# EAGLE board 184550_boards (EAGLE 5.10)
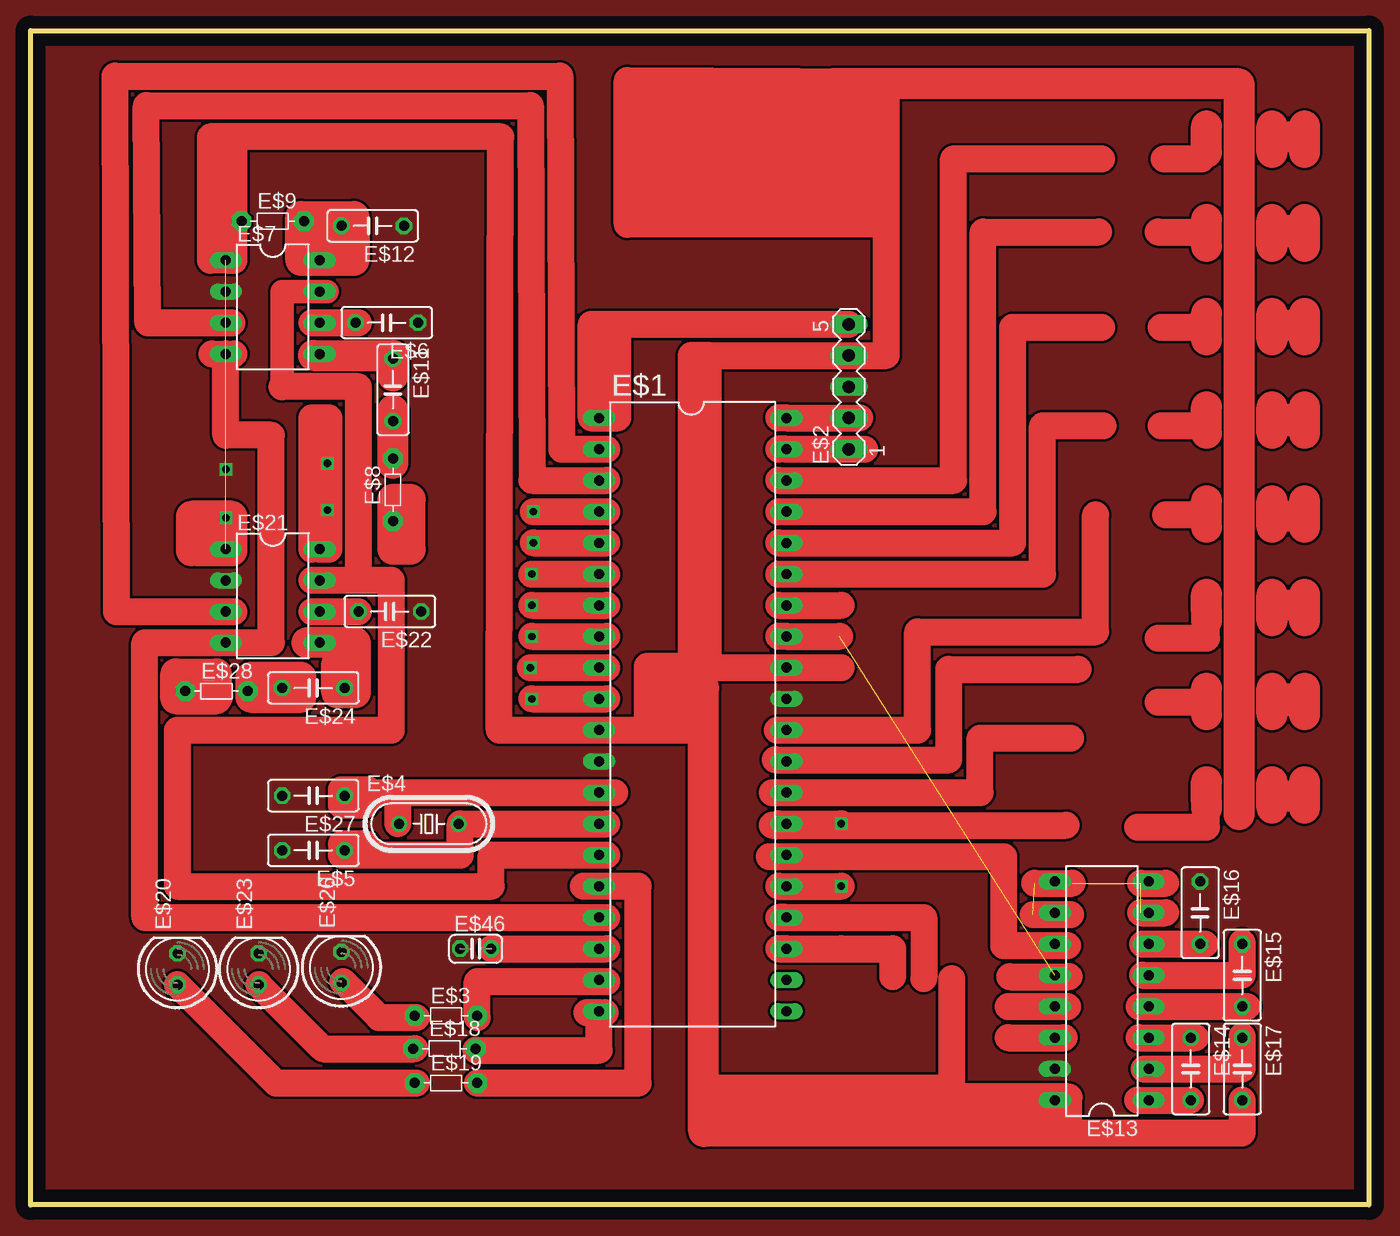
[diagram p0: board, top side]

Size 108.84 x 95.5 mm. Coordinates in mm from the lower left corner, seen from the top.
Outline: 0,95.5 108.84,95.5 108.84,0 0,0 0,95.5
Copper layers (1*16): Top 0.035mm / dielectric 1.5mm / Bottom 0.035mm
Design rules "default": minimum track width 10mil, minimum drill 24mil, track to track 8mil, track to pad 8mil, pad to pad 8mil, via to via 8mil, smd to smd 8mil, copper to edge 40mil, drill to drill 8mil, minimum pad ring 10mil, minimum via ring 8mil, stop-mask expansion 4mil, vias tented up to drill 0mil, thermal gap 10mil

## Footprints (pad centres in the part's own frame; a part is rotated, then mirrored left to right if it is on the bottom)
DIL40 = drill 0.813 long: 1 -24.13,-7.62; 2 -21.59,-7.62; 3 -19.05,-7.62; 4 -16.51,-7.62; 5 -13.97,-7.62; 6 -11.43,-7.62; 7 -8.89,-7.62; 8 -6.35,-7.62; 9 -3.81,-7.62; 10 -1.27,-7.62; 11 1.27,-7.62; 12 3.81,-7.62; 13 6.35,-7.62; 14 8.89,-7.62; 15 11.43,-7.62; 16 13.97,-7.62; 17 16.51,-7.62; 18 19.05,-7.62; 19 21.59,-7.62; 20 24.13,-7.62; 21 24.13,7.62; 22 21.59,7.62; 23 19.05,7.62; 24 16.51,7.62; 25 13.97,7.62; 26 11.43,7.62; 27 8.89,7.62; 28 6.35,7.62; 29 3.81,7.62; 30 1.27,7.62; 31 -1.27,7.62; 32 -3.81,7.62; 33 -6.35,7.62; 34 -8.89,7.62; 35 -11.43,7.62; 36 -13.97,7.62; 37 -16.51,7.62; 38 -19.05,7.62; 39 -21.59,7.62; 40 -24.13,7.62
MA05-1 = drill 1.016 long: 1 -5.08,0; 2 -2.54,0; 3 0,0; 4 2.54,0; 5 5.08,0
R-5 = drill 0.813 pad 1.6 octagon: 1 -2.54,0; 2 2.54,0
HC49/S = drill 0.813 round: 1 -2.413,0; 2 2.413,0
C050-025X075 = drill 0.813 octagon: 1 -2.54,0; 2 2.54,0
DIL08 = drill 0.813 long: 1 -3.81,-3.81; 2 -1.27,-3.81; 3 1.27,-3.81; 4 3.81,-3.81; 5 3.81,3.81; 6 1.27,3.81; 7 -1.27,3.81; 8 -3.81,3.81
DIL16 = drill 0.813 long: 1 -8.89,-3.81; 2 -6.35,-3.81; 3 -3.81,-3.81; 4 -1.27,-3.81; 5 1.27,-3.81; 6 3.81,-3.81; 7 6.35,-3.81; 8 8.89,-3.81; 9 8.89,3.81; 10 6.35,3.81; 11 3.81,3.81; 12 1.27,3.81; 13 -1.27,3.81; 14 -3.81,3.81; 15 -6.35,3.81; 16 -8.89,3.81
C050-030X075 = drill 0.813 octagon: 1 -2.54,0; 2 2.54,0
LED5MM = drill 0.813 octagon: A -1.27,0; K 1.27,0
C025-024X044 = drill 0.813 octagon: 1 -1.27,0; 2 1.27,0

## Placement (x,y rotation side)
E$1  [DIL40]  53.85,39.88 270 top
E$2  [MA05-1]  66.55,66.55 90 top
E$3  [R-5]  33.78,15.37 0 top
E$4  [HC49/S]  32.38,30.99 0 top
E$5  [C050-025X075]  22.99,28.83 180 top
E$6  [C050-025X075]  28.96,71.75 180 top
E$7  [DIL08]  19.69,73.02 270 top
E$8  [R-5]  29.46,58.17 90 top
E$9  [R-5]  19.69,80.01 0 top
E$11  [C050-025X075]  29.46,66.29 270 top
E$12  [C050-025X075]  27.81,79.63 180 top
E$13  [DIL16]  87.12,17.4 90 top
E$14  [C050-030X075]  94.36,11.05 270 top
E$15  [C050-030X075]  98.55,18.67 270 top
E$16  [C050-030X075]  95.12,23.75 270 top
E$17  [C050-030X075]  98.55,11.05 270 top
E$18  [R-5]  33.65,12.7 0 top
E$19  [R-5]  33.78,9.91 0 top
E$20  [LED5MM]  11.94,19.18 90 top
E$21  [DIL08]  19.69,49.53 270 top
E$22  [C050-025X075]  29.21,48.26 180 top
E$23  [LED5MM]  18.54,19.18 90 top
E$24  [C050-025X075]  22.99,42.04 180 top
E$26  [LED5MM]  25.27,19.3 90 top
E$27  [C050-025X075]  22.99,33.27 180 top
E$28  [R-5]  15.11,41.78 0 top
E$46  [C025-024X044]  36.2,20.83 0 top

## Library data of the parts
E$1 = 74xx-eu
E$2 = con-lstb
E$3 E$8 E$9 E$18 E$19 E$28 = discrete
E$4 = crystal
E$5 E$6 E$11 E$12 E$14-E$17 E$22 E$24 E$27 E$46 = rcl
E$7 E$13 E$21 = 40xx
E$20 E$23 E$26 = led

## Nets
GND: E$1.12 E$1.31 E$2.3 E$5.2 E$6.1 E$7.2 E$12.1 E$13.15 E$16.1 E$20.K E$21.2 E$22.1 E$23.K E$26.K E$27.2 E$46.1
S$3: E$1.39
S$4: E$1.40
S$17: E$7.3
S$35: E$1.23
S$36: E$1.24
S$52: E$7.8 E$9.2
S$57: E$1.33 E$13.12
S$59: E$14.2
S$73: E$2.5
S$74: E$21.8
S$77: E$23.A
S$78: E$20.A
S$83: E$7.4
S$124: E$7.1 E$21.1

## Tracks (layer width: path | path; a pad name or v marks a point on that pad's centre or on a via)
GND  (via drill 0.6)  (1 unrouted)
  other vias: 15.87,59.82
  pour Top (no thermals): -10.29,-13.72 136.4,-16.38 135.76,108.2 -2.54,101.6
S$1
  Top 2.54: 22.99,69.09 29.46,69.09 29.46,67.44
S$2
  Top 2.184: 22.86,71.75 26.67,71.75
S$3
  Top 2.184: 67.82,61.47 E$1.39 60.83,61.47
S$4
  Top 2.184: 67.44,64.01 E$1.40 60.83,64.01
S$5  (via drill 0.6)
  Top 2.184: 60.83,25.91 v65.91,25.91
S$6
  Top 2.184: 29.85,33.53 47.5,33.53 | 29.85,33.53 29.85,30.99 | 26.67,33.53 29.85,33.53
S$7
  Top 2.184: 16.13,76.83 14.6,76.83 14.6,86.87 16,86.87 | 55.12,43.69 55.12,69.09 | 55.12,43.69 65.91,43.69 | 50.04,38.61 55.12,43.69 | 50.04,38.61 38.1,38.61 38.23,86.87 16.51,86.87 | 50.04,38.61 54.36,38.61 54.36,38.86 | 55.12,69.09 53.72,69.09 53.72,43.18 | 55.12,69.09 69.6,69.09 69.6,79.76 | 69.6,79.76 48.51,79.76 48.51,91.44 69.6,91.31 69.6,79.76 | 16.51,86.87 16,86.87 | 16,86.87 16,79.5 | 16.51,86.87 16.51,76.83 16.13,76.83 | 16.13,76.83 16.13,84.45
S$8
  Top 2.54: 29.46,60.33 29.46,64.64
S$9  (via drill 0.6)
  Top 2.184: v40.89,56.39 46.86,56.39
S$10  (via drill 0.6)
  other vias: 24.13,56.52
S$11
  Top 2.184: 22.86,69.21 26.67,69.21
S$12
  Top 2.54: 29.46,53.34 29.46,57.4 30.86,57.4 30.86,53.34 29.46,53.34
S$13
  Top 2.54: 13.59,53.21 13.08,53.21 13.08,56.01 16.38,56.01 16.38,53.21 13.59,53.21 | 13.59,53.21 13.59,54.48
S$14  (via drill 0.6)
  other vias: 24.13,60.33
S$15
  Top 2.184: 46.86,30.99 34.92,30.99 34.92,28.45 25.27,28.45 25.27,29.34 27.3,29.34 27.3,28.57
S$16  (via drill 0.6)
  Top 2.184: v40.64,43.69 46.86,43.69
S$17
  Top 2.184: 46.86,58.93 40.77,58.93 40.64,89.41 9.4,89.41 9.52,71.75 E$7.3 16.38,71.75
S$18
  Top 2.184: 16.51,48.26 6.99,48.26 6.86,91.82 43.05,91.82 43.18,61.47 46.86,61.47
S$19  (via drill 0.6)
  Top 2.184: v40.89,53.85 46.86,53.85
S$20  (via drill 0.6)
  Top 2.184: v40.77,48.77 46.86,48.77
S$21  (via drill 0.6)
  Top 2.184: v40.77,46.23 46.86,46.23
S$22
  Top 2.54: 11.81,41.4 15.24,41.4 | 11.81,41.4 11.81,43.18 15.11,43.18 15.11,41.15 11.81,41.15 11.81,41.4
S$23
  Top 2.184: 53.85,67.82 54.48,67.82
S$24
  Top 2.54: 65.15,91.19 98.3,91.19 98.3,31.75
S$25
  Top 2.54: 98.3,77.98 98.3,80.14
S$26  (via drill 0.6)
  Top 2.184: 60.83,30.99 v65.91,30.99
S$27
  Top 2.54: 100.97,70.36 100.97,72.52
S$28
  Top 2.184: 22.86,48.26 26.67,48.26
S$29
  Top 2.184: 14.6,53.34 15.87,53.34 | 15.87,53.34 16.51,53.34 | 15.87,53.34 15.87,55.88
S$30
  Top 2.54: 22.48,45.72 26.42,45.72 26.42,41.66 24.89,41.66 24.89,44.07
S$31
  Top 2.54: 17.91,42.93 21.97,42.93 21.97,41.28 17.91,41.28 17.91,42.93
S$32
  Top 2.184: 27.18,33.66 27.18,32.51 25.27,32.51 25.27,33.78 27.43,33.78
S$33
  Top 2.54: 100.97,62.74 100.97,64.9
S$34
  Top 2.54: 100.97,55.12 100.97,57.28
S$35
  Top 2.184: 60.83,20.83 E$1.23 65.91,20.83
S$36
  Top 2.184: 60.83,23.37 E$1.24 65.91,23.37
S$37  (via drill 0.6)
  Top 2.184: v40.77,41.15 46.86,41.15
S$38
  Top 2.184: 60.83,58.93 75.06,58.93 75.06,85.09 87.12,85.09
S$39
  Top 2.184: 95.25,56.39 95.25,56.26
S$40
  Top 2.184: 60.83,48.77 65.91,48.77
S$41
  Top 2.184: 60.83,51.31 82.3,51.31 82.3,63.37 87.25,63.37
S$42
  Top 2.184: 60.83,53.85 79.88,53.85 79.88,71.37 87.12,71.37
S$43
  Top 2.184: 60.83,56.39 77.47,56.39 77.47,79.12 86.87,79.12
S$44
  Top 2.184: 91.69,40.89 94.74,40.89
S$45  (via drill 0.6)
  other vias: 15.87,55.88
S$46
  Top 2.184: 16.51,78.87 16.51,81.66
S$47
  Top 2.184: 54.74,43.82 50.16,43.82 50.16,39.12
S$48
  Top 2.54: 98.3,47.5 98.3,49.66
S$49
  Top 2.54: 100.97,39.88 100.97,42.04
S$50
  Top 2.54: 100.97,32.26 100.97,34.42
S$51
  Top 2.184: 91.69,46.1 95.63,46.1 95.63,48.26
  Top 2.54: 95.63,47.5 95.63,48.26 95.63,49.66
S$52
  Top 2.184: E$9.2 22.23,77.47 22.86,76.83 23.11,76.83 E$7.8 24,76.83 24.13,76.83
  Top 2.54: 24,76.83 23.11,76.83 21.97,76.83 21.97,80.39 26.29,80.39 26.29,76.83 24,76.83 | 24,76.83 24.13,76.83 24.13,78.87
S$53
  Top 2.184: 92.33,56.13 95.38,56.13
S$54
  Top 2.184: 60.71,38.61 72.14,38.61 72.14,46.61 86.61,46.61 86.61,56.13
S$55
  Top 2.184: 60.58,36.2 74.68,36.2 74.68,43.56 85.22,43.56
S$56
  Top 2.184: 60.32,33.53 77.22,33.53 77.22,37.97 84.58,37.97
S$57  (1 unrouted)
  Top 2.184: 60.83,46.23 E$1.33 65.79,46.23
S$58
  Top 2.184: 60.32,30.86 84.2,30.86
S$59
  Top 2.184: 90.04,8.51 E$14.2
S$60
  Top 2.184: 90.17,13.59 94.74,13.59
S$61
  Top 2.184: 90.17,16.13 98.93,16.13
S$62
  Top 2.184: 90.42,18.67 98.55,18.67 98.55,21.34
S$63
  Top 2.184: 90.42,21.21 95.5,21.21
S$64
  Top 2.184: 90.55,11.05 98.55,11.05 98.55,13.72
S$65
  Top 2.184: 98.55,8.51 98.55,5.84 84.45,5.84 | 56.52,8.76 84.45,8.76 84.45,5.84 | 54.86,5.84 84.45,5.84
S$66
  Top 2.184: 60.07,28.32 79.12,28.32 79.12,21.08 84.33,21.08
S$67
  Top 2.184: 79.5,16.13 84.33,16.13
S$68
  Top 2.184: 79.63,18.54 84.45,18.54
S$69
  Top 2.184: 79.5,13.59 84.07,13.59
S$70  (3 unrouted)
  Top 2.184: 81.53,23.62 84.58,23.62 | 81.66,26.16 84.71,26.16 | 90.3,23.75 92.33,23.75 | 90.3,26.16 92.33,26.16
S$71
  Top 2.184: 54.99,9.53 74.93,9.53 74.93,11.94
S$72
  Top 2.54: 54.74,5.97 54.74,42.04
S$73
  Top 2.184: 47.75,70.1 47.75,64.01 45.59,64.01 45.59,71.63 E$2.5 | 47.75,70.1 47.37,70.1 | 47.75,70.1 47.75,71.25
S$74
  Top 2.184: 23.62,53.47 22.86,53.47 22.86,64.01 24.26,64.01 24.26,53.34 E$21.8 | E$21.8 24.13,53.34 24.13,60.83 | E$21.8 22.86,53.34
S$75
  Top 1.93: 24.13,74.3 20.45,74.3 20.45,66.55
  Top 2.184: 20.45,66.55 26.67,66.55 26.67,50.8 | 26.67,50.8 22.86,50.8 | 26.67,50.8 29.34,50.8 29.34,38.61 11.94,38.61 11.94,25.91 37.46,25.91 37.46,28.45 46.86,28.45
S$76
  Top 2.184: 25.4,18.16 28.32,15.24 31.37,15.24
S$77
  Top 2.184: E$23.A 23.75,12.7 31.24,12.7
S$78
  Top 2.184: E$20.A 19.94,9.91 31.37,9.91
S$79
  Top 2.184: 95.63,32.77 95.63,30.73 90.04,30.73
  Top 2.54: 95.63,32.26 95.63,32.77 95.63,34.42
S$80
  Top 2.184: 92.2,85.09 95.25,85.09
S$81
  Top 2.54: 95.63,39.88 95.63,42.04
S$82
  Top 2.54: 98.3,32.26 98.3,34.42
S$83
  Top 2.184: E$7.4 15.87,62.61 19.56,62.61 19.56,45.72 9.27,45.72 9.27,23.37 46.86,23.37
S$84
  Top 2.54: 98.3,39.88 98.3,42.04
S$85
  Top 2.184: 37.46,20.83 46.86,20.83
S$86
  Top 2.184: 72.64,18.41 72.64,23.37 60.83,23.37
S$87
  Top 2.184: 70.1,18.54 70.1,20.83 60.83,20.83
S$88
  Top 2.54: 100.97,47.5 100.97,49.66
S$89  (via drill 0.6)
  Top 2.184: v40.77,51.31 46.86,51.31
S$90
  Top 2.54: 103.63,32.26 103.63,34.42
S$91  (via drill 0.6)
  other vias: 36.32,15.37
S$92
  Top 2.54: 95.63,55.12 95.63,57.28
S$93
  Top 2.54: 98.3,55.12 98.3,57.28
S$94
  Top 2.54: 95.63,62.74 95.63,64.9
S$95
  Top 2.54: 98.3,62.74 98.3,64.9
S$96
  Top 2.54: 95.63,70.36 95.63,72.52
S$97
  Top 2.54: 98.3,70.36 98.3,72.52
S$98
  Top 2.184: 36.32,15.24 36.32,18.16 46.86,18.16
S$99
  Top 2.184: 36.2,12.57 46.23,12.57 46.23,15.62 | 46.23,15.62 45.21,15.62 | 46.23,15.62 46.74,15.62
S$100
  Top 2.184: 91.95,63.37 95,63.37
S$101
  Top 2.184: 55.12,43.69 65.91,43.69
S$102
  Top 2.184: 91.95,71.37 95,71.37
S$103
  Top 2.54: 100.97,85.6 100.97,87.76
S$104
  Top 2.54: 95.63,85.6 95.63,87.76
S$105
  Top 2.184: 91.69,79.12 94.74,79.12
S$106
  Top 2.54: 100.97,77.98 100.97,80.14
S$107
  Top 2.54: 95.63,77.98 95.63,80.14
S$108
  Top 2.54: 103.63,39.88 103.63,42.04
S$109
  Top 2.184: 83.57,7.37 56.52,7.37 56.52,8.38 74.93,8.38 74.93,18.41
S$110
  Top 2.54: 103.63,47.5 103.63,49.66
S$111
  Top 2.54: 103.63,55.12 103.63,57.28
S$112
  Top 2.54: 103.63,62.74 103.63,63.88 | 103.63,63.88 103.63,64.9 | 103.63,63.88 102.23,63.88 102.23,63.75
S$113
  Top 2.54: 103.63,70.36 103.63,71.5 | 103.63,71.5 103.63,72.52 | 103.63,71.5 101.85,71.5
S$114
  Top 2.54: 103.63,85.6 103.63,87.76
S$115
  Top 2.54: 103.63,77.98 103.63,80.14
S$116
  Top 2.54: 103,86.87 101.09,86.87 101.09,86.99
S$117
  Top 2.54: 103.38,79.25 102.23,79.25 102.23,79.12
S$118
  Top 2.54: 103.12,56.01 101.73,56.01 101.73,56.13
S$119
  Top 2.54: 103.12,48.77 102.23,48.77
S$120
  Top 2.54: 103.25,41.15 102.36,41.15 102.36,41.02
S$121
  Top 2.54: 103.25,33.27 101.73,33.27 101.73,33.15
S$122
  Top 2.184: 14.73,69.21 16.51,69.21
S$123  (via drill 0.6)
  Top 2.184: 44.96,25.91 49.4,25.91 49.4,9.91 v36.32,9.91
S$124  (1 unrouted)
(copper drawn outside any net)
  shapes: Top area x2

## Text on the board
Unrouted: VDD | CLK | VSS | RSET | OUT | GND | STROBE | 1k | IN | MCLR | PGD | RA0 | PGC | RA1 | RB5 | RA2 | RB4 | VDD | CLK | RA3 | RB3 | RA4 | RB2 | VSS | RSET | RA5 | RB1 | SCL | OUT | GND | STROBE | IN | RE0 | RB0 | sdi | RE1 | VDD | RE2 | VSS | VDD | RD7 | 22pf | VSS | RD6 | 20mhz | OSC1 | RD5 | 22pf | OSC2 | RD4 | RC0 | RC7 | SDO | 9 | 8 | + | RC1 | RC6 | VBUS | 10 | 7 | 1uf | RC2 | D+ | green | D+ | 11 | 6 | VUSB | D- | D- | white | 1uf | 12 | 5 | RD0 | RD3 | 13 | 4 | RD1 | RD2 | 14 | 3 | 15 | 1uf | 2 | + | 16 | 1